# Altium PCB IPMC_MACP - 完成1.PcbDoc (part 2 of 2)
Units mil, origin at the board's own origin, x right, y up, seen from the top; angles counter-clockwise.
Board outline 3909.92 x 3909.91 mil, 2 copper layers (Top Layer, Bottom Layer); 134 components, 84 nets, 498 pads, 203 vias.
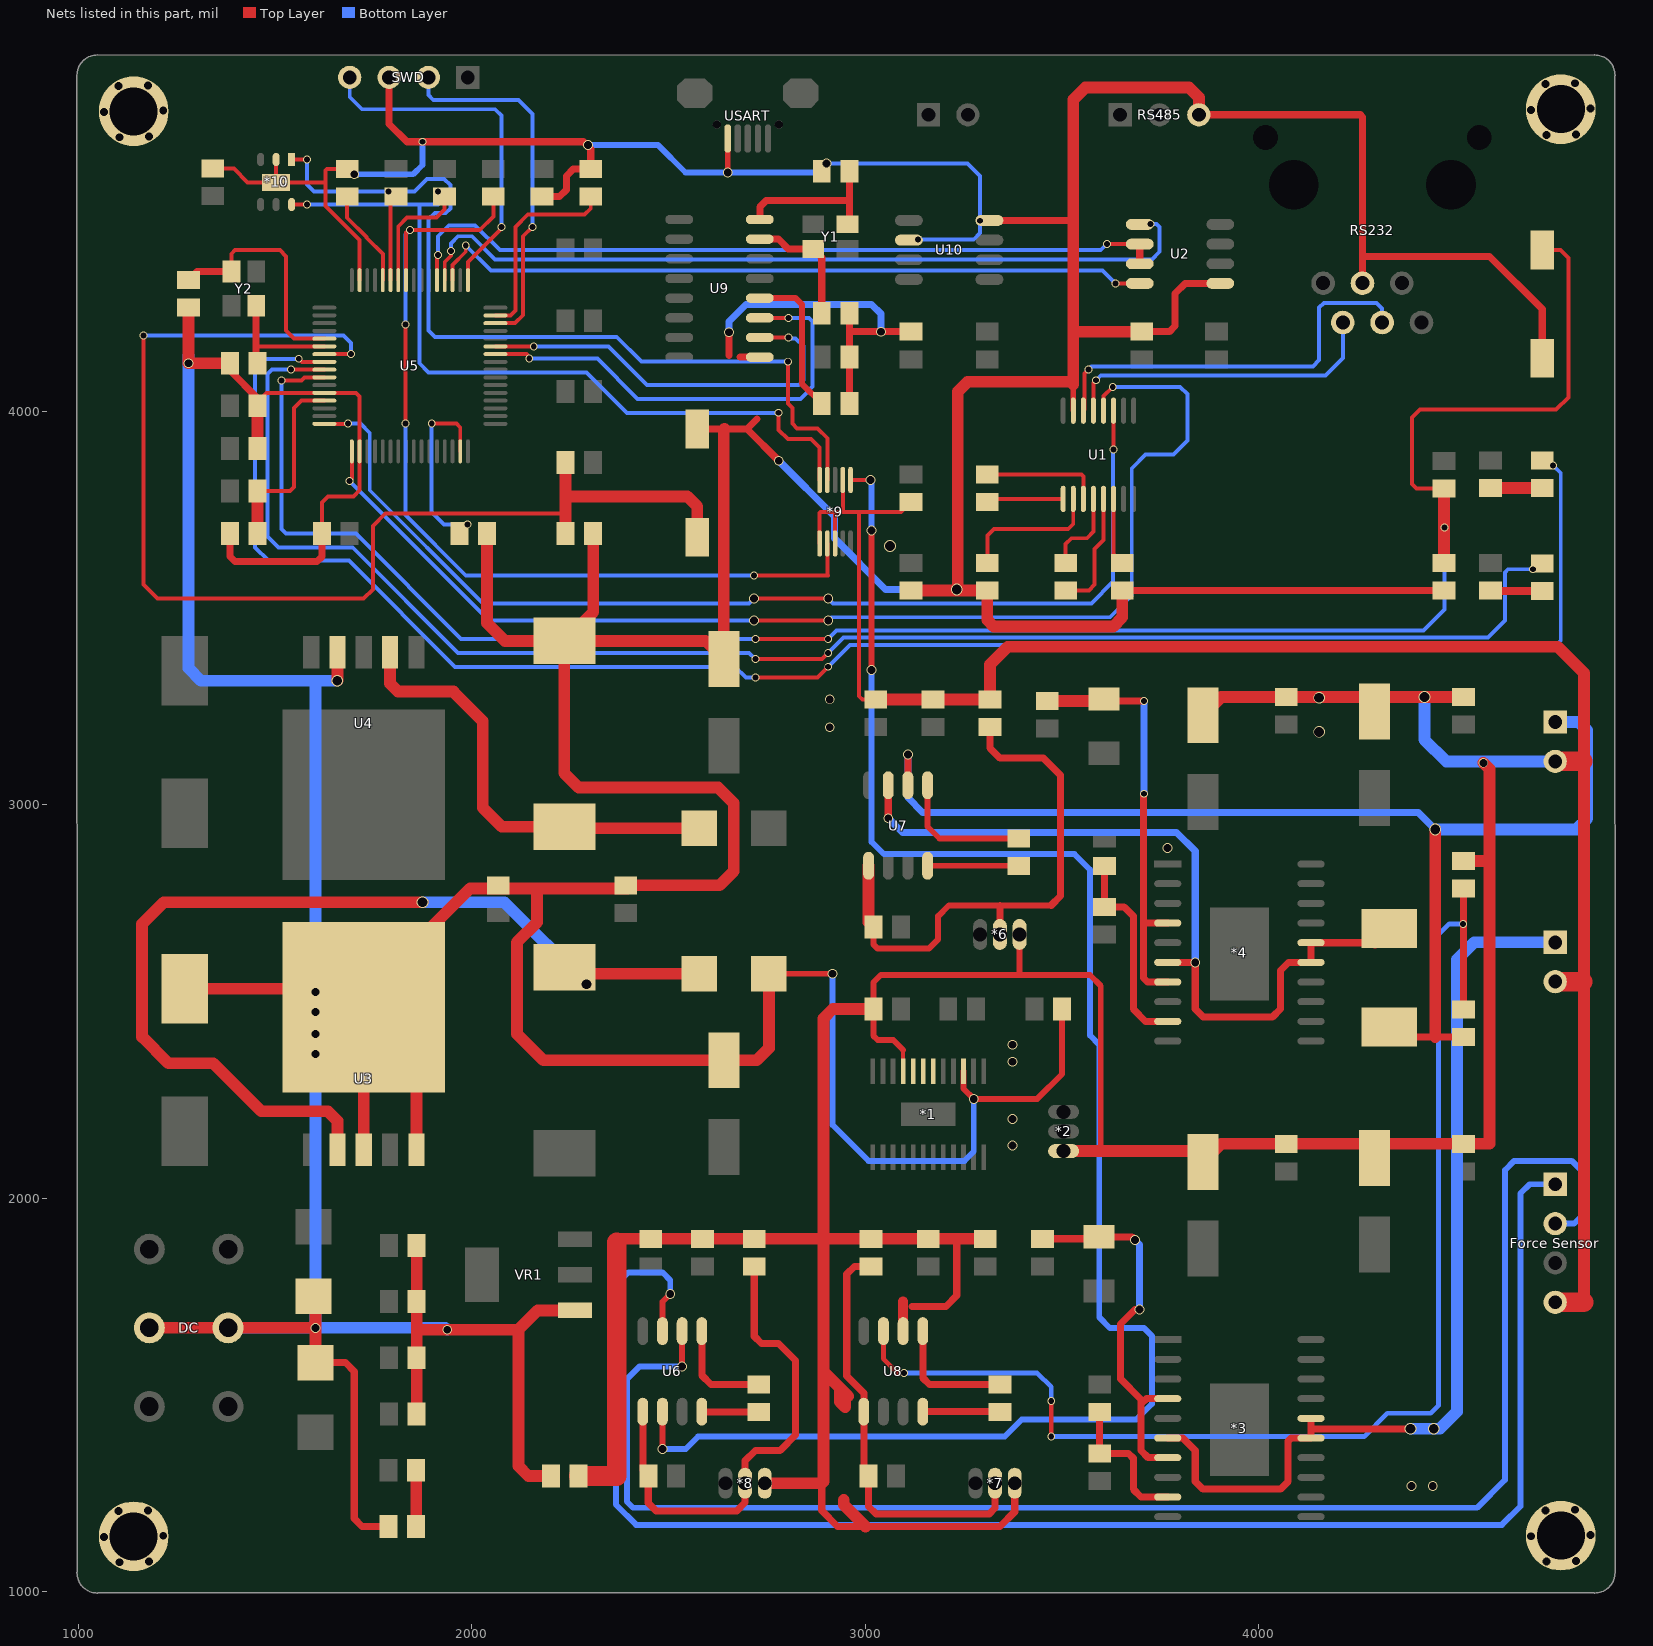
[diagram p2: the nets of this part, all layers, seen from the top]

## Via types
v1: diameter 20, hole 15, Top Layer to Bottom Layer, 76 vias
v2: diameter 25, hole 20, Top Layer to Bottom Layer, 71 vias
v3: diameter 30, hole 25, Top Layer to Bottom Layer, 32 vias
v4: diameter 20, hole 20, Top Layer to Bottom Layer, 24 vias

## Nets (pads, with @x,y where several pads share a name; then routed paths per layer and width w, separated by ;. In a path a pad name is that pad's centre, name@x,y a point inside that pad or via, vN(x,y) a via of type N, cw(c..) or ccw(c..) an arc to the next point about the centre after c; other vN are vias at no path point) (continued)
Force0: *9.6 U6.6 | length 4413
  Top Layer w10: *9.6@2962.39,3825.28 v2(3013.31,3825.28)
  Top Layer w15: v2(2484.29,1362.24) U6.6@2484.29,1456.95 ; v2(3015.75,3342.52) v2(3015.75,3696.85)
  Bottom Layer w15: v2(2484.29,1362.24) 2543.35,1362.24 2574.8,1393.7 3354.33,1393.7 3397.64,1437.01 3688.98,1437.01 3728.35,1476.38 3728.35,1649.61 3708.66,1669.29 3622.05,1669.29 3594.49,1696.85 3594.49,2389.76 3570.87,2413.39 3570.87,2834.65 3531.5,2874.02 3047.24,2874.02 3015.75,2905.51 v2(3015.75,3342.52) ; v2(3015.75,3696.85) v2@3015.75,3822.83
Force+: "Force Sensor.1" U6.3 | length 4089
  Top Layer w15: U6.3@2484.29,1661.68 2484.29,1736.26 v2(2503.94,1755.91)
  Bottom Layer w15: v2(2503.94,1755.91) 2503.94,1791.34 2484.25,1811.02 2397.64,1811.02 2366.14,1779.53 2366.14,1220.47 2417.32,1169.29 4618.11,1169.29 4665.35,1216.54 4665.35,2011.81 4688.54,2035 4753.64,2035
Force-: "Force Sensor.2" U6.2 | length 4016.8
  Top Layer w15: v2(2534.29,1572.01) U6.2@2534.29,1661.68
  Bottom Layer w15: v2(2534.29,1572.01) 2426.34,1572.01 2393.7,1539.37 2393.7,1228.35 2409.45,1212.6 4555.12,1212.6 4625.98,1283.46 4625.98,2070.87 4649.61,2094.49 4795.28,2094.49 4822.83,2066.93 4822.83,1956.69 4801.14,1935 4753.64,1935
GND: *1.15 *10.2 C1.1 C3.2 C5.2 C7.1 C8.2 C9.2 C18.2 C19.1 C20.2 C22.1 C23.2 C26.1 C27.1 C28.1 C29.1 C39.2 C40.2 C41.2 C42.1 C43.2 C45.1 C46.1 C47.1 C48.1 C49.1 C50.2 C51.2 C52.2 C53.2 C54.2 C55.2 D1.1 D7.1 D8.2 D9.K DC.2 KEY.2 L2.2 L3.1 R27.1 RESET.2 RS232.4 RS485.3 SWD.3 T1.1 T2.1 T3.1 U1.15 U2.5 U3.3 U3.5 U3.6 U4.4 U5.12 U5.18 U5.63 U9.1 U10.2 U10.8 USART.5 VR1.1 | length 26229.1
  Top Layer w10: C55.2@1341.18,4616.93 1394.88,4616.93 1429.92,4581.89 *10.2@1501.5,4581.89 ; C52.2@1455.04,4023.62 1478.15,4046.73 U5.12@1624.68,4046.73 1705.24,4046.73 1714.25,4037.72 U5.18@1714.25,3898.11 1714.25,3799.21 1698.5,3783.46 1633.86,3783.46 1618.5,3768.11 C54.2@1618.5,3689.37 ; *10.2@1502.13,4639.89 1502.13,4582.52 *10.2@1501.5,4581.89 ; R27.1@1682.76,4615.67 1631.42,4615.67 1627.48,4611.73 1627.48,4578.74 ; U5.63@1714.25,4333.15 1714.25,4434.97 1627.48,4521.74 1627.48,4578.74 ; *10.2@1501.5,4581.89 1624.33,4581.89 1627.48,4578.74
  Top Layer w15: v2(2650.08,4606.77) USART.5@2650.08,4693.64 ; D1.1@2754.69,2570 v2(2916.46,2570) ; *1.15@3249.48,2322.45 3249.48,2278.08 v2(3275.59,2251.97) 3437.01,2251.97 3500.2,2315.16 C1.1@3500.2,2480.51 ; U1.15@3528.54,4001.57 3528.54,4067.91
  Top Layer w18: C53.2@1384.96,3689.37 1384.96,3630.79 1397.64,3618.11 1606.3,3618.11 1618.5,3630.32 C54.2@1618.5,3689.37 ; C48.1@1384.96,4121.89 1384.96,4103.23 1455.04,4033.15 1455.04,4023.62 C52.2@1455.04,4013.76 ; D8.2@1602.2,1581.69 1678.15,1581.69 1700.79,1559.06 1700.79,1185.04 1720.83,1165 D9.K@1788.11,1165 ; SWD.3@1789.25,4848.64 1789.25,4730.43 1834.65,4685.04 v1(1874.02,4685.04) 2283.46,4685.04 2301.97,4666.54 C41.2@2301.97,4615.67 2257.4,4615.67 2240.16,4598.43 2240.16,4562.99 2222.76,4545.59 C51.2@2178.13,4545.59 ; RESET.2@2572.52,3954.96 2641.73,3954.96 2699.06,3954.96 ; 2653.54,4141.73 v2(2653.54,4200.79) ; 2681.46,4137.44 U9.1@2731.68,4137.44 ; 2724.41,3980.31 2699.06,3954.96 ; v2(2780,3874.02) 2699.06,3954.96 ; C43.2@2959.24,4019.68 C42.1@2959.24,4138.23 2959.24,4204.72 ; C45.1@2959.24,4249.28 2959.24,4204.72 ; C49.1@3115.82,4202.2 v2(3039.37,4202.2) 2961.76,4202.2 2959.24,4204.72 ; U10.8@3315.29,4485 3527.8,4485 3528.54,4484.25 ; C8.2@3653.23,3544.33 C20.2@4456.16,3544.33 ; C7.1@3702.79,4202.2 3773.07,4202.2 3787.4,4216.54 3787.4,4299.21 3813.19,4325 U2.5@3902.26,4325 ; RS485.3@3847.75,4753.64 4258.17,4753.64 4263.67,4748.14 4263.67,4393.7 ; RS232.4@4263.67,4325.57 4263.67,4393.7 ; KEY.2@4720.71,4134.41 4720.71,4259.61 4586.61,4393.7 4263.67,4393.7
  Top Layer w30: DC.2@1180,1670 DC.2@1380,1670 1591.26,1670 v2@1594.49,1673.23 ; C9.2@1270,2531.77 1678.23,2531.77 U3.6@1725,2485 ; C47.1@1279.37,4263.8 1279.37,4122.2 v2(1279.69,4121.89) C48.1@1384.96,4121.89 ; C50.2@1455.04,3905.63 C52.2@1455.04,4013.76 ; D8.2@1602.52,1593.7 v2(1602.52,1669.29) D7.1@1602.52,1756.89 ; v3(1657.48,3314.96) 1658.07,3315.55 U4.4@1658.07,3387.68 ; U3.3@1725,2122.32 U3.6@1725,2485 ; U3.5@1858.86,2122.32 1858.86,2351.14 U3.6@1725,2485 ; C27.1@1859.39,1450.84 C26.1@1859.39,1593.75 1859.39,1665.21 ; C29.1@1859.39,1879.59 C28.1@1859.39,1736.67 1859.39,1665.21 ; C40.2@2038.58,3689.37 2038.58,3461.42 2083.78,3416.22 L2.2@2234.69,3416.22 ; L3.1@2201.18,1293.31 2143.7,1293.31 2117.97,1319.04 2117.97,1665.21 ; VR1.1@2261.89,1714.45 2167.2,1714.45 2117.97,1665.21 ; C39.2@2308.07,3689.37 2308.07,3489.61 L2.2@2234.69,3416.22 ; C23.2@2390.79,2794.88 2629.53,2794.88 2665.35,2830.71 2665.35,3003.94 2625.98,3043.31 2271.65,3043.31 2234.69,3080.28 L2.2@2234.69,3416.22 ; C23.2@2394.72,2787.01 2165.35,2787.01 ; 2641.73,3954.96 2640.12,3953.35 C22.1@2640.12,3370 2593.9,3416.22 L2.2@2234.69,3416.22 ; D1.1@2754.69,2570 2754.69,2380.67 2724.02,2350 C18.2@2640.12,2350 2181.5,2350 2114.17,2417.32 2114.17,2649.61 2165.35,2700.79 2165.35,2787.01 ; C3.2@3115.82,3544.33 3212.6,3544.33 ; 3528.54,4067.91 3528.54,4074.8 ; C8.2@3653.23,3544.33 3653.23,3476.38 3629.61,3452.76 3326.77,3452.76 3310.04,3469.49 C5.2@3310.04,3544.33 3212.6,3544.33 ; C7.1@3702.79,4202.2 3528.54,4202.2 ; RS485.3@3847.75,4753.64 3847.75,4797.91 3822.83,4822.83 3559.05,4822.83 3528.54,4792.32 3528.54,4484.25 3528.54,4202.2 ; U3.6@1725,2485 1725,2516.34 1995.67,2787.01 2070.71,2787.01 2165.35,2787.01 ; 1859.39,1665.21 v2(1937.01,1665.21) 2117.97,1665.21 ; 3212.6,3544.33 3229.37,3544.33 3235.03,3549.99 3235.03,4049.99 3259.84,4074.8 3528.54,4074.8 ; 3528.54,4074.8 3528.54,4202.2
  Bottom Layer w10: v2(2901.57,4629.92) 3259.84,4629.92 3291.34,4598.43 v1(3291.34,4484.25) 3291.34,4452.76 3275.59,4437.01 v1(3133.86,4437.01)
  Bottom Layer w15: v2(1700.79,4602.36) 1850.39,4602.36 1874.02,4625.98 v1(1874.02,4685.04) ; v2(2295.28,4677.17) 2472.44,4677.17 2542.83,4606.77 v2(2650.08,4606.77) 2878.43,4606.77 v2(2901.57,4629.92) ; v2(2916.46,2570) 2916.46,2185.91 3007.87,2094.49 3251.97,2094.49 3275.59,2118.11 v2(3275.59,2251.97)
  Bottom Layer w18: v2(2653.54,4200.79) 2653.54,4228.35 2696.85,4271.65 3015.75,4271.65 3039.37,4248.03 v2(3039.37,4202.2) ; v2(2780,3874.02) 2921.26,3732.76 2921.26,3677.17 3051.18,3547.24 3212.6,3547.24
  Bottom Layer w30: 1279.53,4141.73 1279.53,3346.46 1311.02,3314.96 1598.43,3314.96 ; DC.2@1380,1670 v2@1602.52,1670 ; v2(1602.52,1669.29) v2@1602.52,1670 ; v3(1657.48,3314.96) 1598.43,3314.96 ; v2(1937.01,1665.21) 1932.22,1670 v2@1602.52,1670 ; 1598.43,3314.96 1602.52,3310.87 v2(1602.52,2523.46) v2(1602.52,2366.14) v2@1602.52,1670
  other v2: 1602.36,2417.32 1602.36,2472.44
  other v3: 3232.28,3547.24 3062.99,3657.48
  other v4: 1103.77,1074.09 1178.96,1075.66 1064.8,1138.43 1215.2,1141.57 1101.04,1204.34 1176.23,1205.91 1103.77,4696.61 1178.96,4698.18 4731.48,4701.81 4806.68,4703.38 1064.8,4760.94 1215.2,4764.09 4692.52,4766.14 4842.91,4769.29 1101.04,4826.85 1176.23,4828.43 4728.75,4832.05 4803.95,4833.63
KEY1: C20.1 KEY.1 R5.2 U5.10 | length 5093.5
  Top Layer w10: v1(1516.26,4078.23) 1566.42,4078.23 1574.29,4086.1 U5.10@1624.68,4086.1 ; v1(2720.47,3421.26) v1(2905.51,3421.26) ; R5.2@4470.71,3803.78 4400.94,3803.78 4389.76,3814.96 4389.76,3984.25 4409.45,4003.94 4755.91,4003.94 4787.4,4035.43 4787.4,4389.76 4767.17,4410 KEY.1@4720.71,4410
  Top Layer w30: C20.1@4470.71,3614.41 R5.2@4470.71,3803.78
  Bottom Layer w10: v1(1516.26,4078.23) 1516.26,3700.28 1527.56,3688.98 1704.72,3688.98 1972.44,3421.26 v1(2720.47,3421.26) ; v1(2905.51,3421.26) 2926.45,3442.2 4418.57,3442.2 4472.44,3496.06 v1(4472.44,3704.72)
LED_G: LED1.K U5.9 | length 4073.9
  Top Layer w10: v1(1539.88,4105.79) U5.9@1624.68,4105.79 ; v1(2720.47,3370.08) 2889.76,3370.08 v1(2905.51,3385.83)
  Bottom Layer w10: v1(1539.88,4105.79) 1491.61,4105.79 1480.32,4094.49 1480.32,3681.1 1507.87,3653.54 1696.85,3653.54 1964.57,3385.83 2704.72,3385.83 v1(2720.47,3370.08) ; v1(2905.51,3385.83) 2944.88,3425.2 4582.68,3425.2 4625.98,3468.5 4625.98,3590.55 4633.86,3598.43 v1(4696.85,3598.43)
LED_R: LED0.K U5.8 | length 4593.4
  Top Layer w10: v1(1559.57,4133.35) 1567.44,4125.47 U5.8@1624.68,4125.47 ; v1(2720.47,3322.83) 2877.95,3322.83 v1(2905.51,3350.39)
  Bottom Layer w10: v1(1559.57,4133.35) 1471.93,4133.35 1448.82,4110.24 1448.82,3653.54 1482.28,3620.08 1687.01,3620.08 1956.69,3350.39 2669.29,3350.39 2696.85,3322.83 v1(2720.47,3322.83) ; v1(2905.51,3350.39) 2960.63,3405.51 4755.91,3405.51 4767.72,3417.32 4767.72,3842.52 v1(4748.03,3862.2)
Net*3_4: *3.4 *3.7 D5.2 R6.1 | length 983.5
  Top Layer w18: R6.1@3450.34,1896.38 3589.31,1896.38 D5.2@3594.37,1901.44 3677.3,1901.44 v2(3685.04,1893.7) ; v2(3696.85,1716.54) 3685.04,1716.54 3648.31,1679.81 3648.31,1540.67 3700.79,1488.19 3700.79,1476.38 ; *3.7@3768.63,1339.91 3719.15,1339.91 3700.79,1358.27 3700.79,1476.38 ; *3.4@3768.63,1489.91 3714.31,1489.91 3700.79,1476.38
  Bottom Layer w18: v2@3681.1,1897.64 3696.85,1881.89 v2(3696.85,1716.54)
Net*3_9: *3.9 C24.2 R10.2 | length 370.4
  Top Layer w18: R10.2@3595.69,1456.1 C24.2@3595.69,1350.61 3669.07,1350.61 3681.1,1338.58 3681.1,1259.84 3701.04,1239.91 *3.9@3768.63,1239.91
Net*4_4: *4.4 *4.7 D6.2 R8.1 | length 1079
  Top Layer w18: D6.2@3601.44,3263.24 3601.98,3263.78 v1(3708.66,3263.78) ; v1(3708.66,3027.56) 3707.1,3026 3707.1,2699 ; *4.7@3768.63,2549 3717.16,2549 3707.1,2559.06 3707.1,2699 ; *4.4@3768.63,2699 3707.1,2699
  Top Layer w30: R8.1@3462.47,3263.24 D6.2@3601.44,3263.24
  Bottom Layer w18: v1(3708.66,3027.56) v1(3708.66,3263.78)
Net*4_6: *4.6 *4.15 *4.16 R7.1 U7.3 | length 2051.3
  Top Layer w18: v2(3058.14,2965.48) U7.3@3058.14,3049.32 ; *4.6@3768.63,2599 v2@3838.58,2599 ; v2(3838.58,2598.43) 3838.58,2480.31 3858.27,2460.63 4035.43,2460.63 4055.12,2480.32 4055.12,2578.74 4075.38,2599 *4.15@4132.96,2599 *4.16@4132.96,2649 R7.1@4295.44,2649
  Top Layer w30: R7.1@4295.44,2649 R7.1@4331.43,2684.98
  Bottom Layer w18: v2(3058.14,2965.48) 3094.49,2929.13 3791.34,2929.13 3838.58,2881.89 v2(3838.58,2598.43)
Net*4_9: *4.9 C25.2 R11.2 | length 523.6
  Top Layer w18: R11.2@3607.81,2843.74 C25.2@3607.81,2739.71 3657.93,2739.71 3681.1,2716.54 3681.1,2480.32 3712.42,2449 *4.9@3768.63,2449
Net*6_2: *6.2 C30.2 R18.1 U7.5 | length 1417.3
  Top Layer w15: R18.1@3020.35,2689 3020.35,2645.01 3031.5,2633.86 3161.42,2633.86 3185.04,2657.48 3185.04,2716.54 3212.6,2744.09 3342.52,2744.09 3472.44,2744.09
  Top Layer w18: C30.2@3317.13,3196.91 3317.13,3143.5 3342.52,3118.11 3452.76,3118.11 3496.06,3074.8 3496.06,2767.72 3472.44,2744.09 ; *6.2@3341.89,2670 3341.89,2743.46 3342.52,2744.09
  Top Layer w30: U7.5@3008.14,2844.59 3008.14,2701.21 R18.1@3020.35,2689
Net*7_2: *7.2 C31.2 R19.1 U8.5 | length 1082.4
  Top Layer w18: C31.2@3014.32,1826.3 2971.97,1826.3 2952.76,1807.09 2952.76,1547.24 2996.02,1503.98 U8.5@2996.02,1456.95 2996.02,1305.51 R19.1@3008.22,1293.31 3008.22,1216.19 3027.56,1196.85 3314.96,1196.85 3329.76,1211.65 *7.2@3329.76,1275
Net*8_2: *8.2 C32.2 R20.1 U6.5 | length 1260.6
  Top Layer w18: U6.5@2434.29,1456.95 2434.29,1307.2 R20.1@2448.19,1293.31 2448.19,1225.04 2468.5,1204.72 2673.23,1204.72 2694.29,1225.79 *8.2@2694.29,1275 2694.29,1332.09 2720.47,1358.27 2783.46,1358.27 2822.83,1397.64 2822.83,1586.61 2779.53,1629.92 2736.22,1629.92 2717.54,1648.6 C32.2@2717.54,1826.3
NetC2_1: C2.1 U1.3 | length 303.6
  Top Layer w10: C2.1@3310.04,3839.61 3549.17,3839.61 3554.13,3834.65 U1.3@3554.13,3777.17
NetC2_2: C2.2 U1.1 | length 196.1
  Top Layer w10: C2.2@3310.04,3769.53 3317.68,3777.17 U1.1@3502.95,3777.17
NetC4_1: C4.1 U1.4 | length 215
  Top Layer w10: C4.1@3509.25,3614.41 3509.25,3662.8 3523.62,3677.17 3562.99,3677.17 3579.72,3693.9 U1.4@3579.72,3777.17
NetC4_2: C4.2 U1.5 | length 307
  Top Layer w10: C4.2@3509.25,3544.33 3567.95,3544.33 3582.68,3559.06 3582.68,3649.61 3605.31,3672.24 U1.5@3605.31,3777.17
NetC5_1: C5.1 U1.2 | length 364
  Top Layer w10: C5.1@3310.04,3614.41 3310.04,3684.06 3326.77,3700.79 3515.75,3700.79 3528.54,3713.58 U1.2@3528.54,3777.17
NetC8_1: C8.1 U1.6 | length 172
  Top Layer w10: U1.6@3630.91,3777.17 3630.91,3636.73 C8.1@3653.23,3614.41
NetC40_1: C40.1 U5.31 | length 465.3
  Top Layer w10: v1(1897.64,3968.5) 1960.63,3968.5 1970.16,3958.98 U5.31@1970.16,3898.11
  Bottom Layer w10: v1(1897.64,3968.5) 1897.64,3744.09 1929.13,3712.6 v1(1988.19,3712.6)
NetC41_1: C41.1 U5.47 | length 509.4
  Top Layer w10: U5.47@2059.72,4243.58 2097.91,4243.58 2110.24,4255.91 2110.24,4468.5 2141.73,4500 2286.22,4500 2301.97,4515.75 C41.1@2301.97,4545.59
NetC43_1: C43.1 U9.4 | length 386.4
  Top Layer w15: U9.4@2731.68,4287.44 2822.8,4287.44 2838.58,4271.65 2838.58,4070.26 C43.1@2889.16,4019.68
NetC45_2: C45.2 U9.7 Y1.1 | length 318.6
  Top Layer w18: U9.7@2731.68,4437.44 2779.09,4437.44 2803.96,4412.57 Y1.1@2867.84,4412.57 2889.16,4391.25 C45.2@2889.16,4249.28
NetC46_2: C46.2 U9.8 Y1.3 | length 402.6
  Top Layer w18: U9.8@2731.68,4487.44 2731.68,4519.08 2748.03,4535.43 2959.24,4535.43 ; Y1.3@2954.45,4475.57 2959.24,4480.35 2959.24,4535.43 ; C46.2@2959.24,4610.24 2959.24,4535.43
NetC53_1: C53.1 L4.1 U5.13 | length 490.5
  Top Layer w10: L4.1@1455.04,3797.5 1537.66,3797.5 1547.24,3807.09 1547.24,4007.87 1566.42,4027.05 U5.13@1624.68,4027.05
  Top Layer w30: C53.1@1455.04,3689.37 L4.1@1455.04,3797.5
NetD1_2: D1.2 L1.1 U3.2 | length 2535
  Top Layer w30: U3.2@1658.07,2122.32 1658.07,2196.26 1633.86,2220.47 1464.57,2220.47 1342.52,2342.52 1228.35,2342.52 1161.42,2409.45 1161.42,2696.85 1216.54,2751.97 v3(1874.02,2751.97) ; L1.1@2234.69,2586.22 2250.91,2570 D1.2@2577.52,2570
  Bottom Layer w30: v3(1874.02,2751.97) 2082.68,2751.97 v3(2291.34,2543.31)
NetD2_A: LED1.A R3.2 | length 132.4
  Top Layer w20: R3.2@4588.82,3544.33 4590.06,3543.09 LED1.A@4720.71,3543.09
NetD3_A: LED0.A R4.2 | length 131.9
  Top Layer w30: R4.2@4588.82,3804.96 LED0.A@4720.71,3804.96
NetD4_2: D4.2 L2.1 U4.2 | length 1147
  Top Layer w30: U4.2@1791.93,3387.68 1791.93,3307.68 1812.2,3287.4 1952.76,3287.4 2027.56,3212.6 2027.56,2992.13 2075.91,2943.78 L2.1@2234.69,2943.78 2238.46,2940 D4.2@2577.52,2940
NetD9_A: D9.A R24.2 | length 142.9
  Top Layer w30: D9.A@1858.19,1165 R24.2@1858.19,1307.92
NetR9_2: R9.2 R12.1 U8.3 | length 3247
  Top Layer w12: U8.3@3046.02,1661.68 3046.02,1591.78 3082.68,1555.12 v1(3098.43,1555.12) ; v1(3472.44,1393.7) v1(3472.44,1484.25)
  Top Layer w18: R9.2@4520.18,2479.71 R12.1@4520.18,2786.39
  Bottom Layer w12: v1(3098.43,1555.12) 3437.01,1555.12 3472.44,1519.68 v1(3472.44,1484.25) ; v1(3472.44,1393.7) 4267.72,1393.7 4326.77,1452.76 4437.01,1452.76 4456.69,1472.44 4456.69,2669.29 4484.25,2696.85 v1(4519.69,2696.85)
NetR13_1: R13.1 U8.1 | length 322
  Top Layer w18: U8.1@3146.02,1661.68 3146.02,1542.96 3162.8,1526.18 R13.1@3342.31,1526.18
NetR13_2: R13.2 U8.8 | length 196.6
  Top Layer w18: U8.8@3146.02,1456.95 3341.46,1456.95 R13.2@3342.31,1456.1
NetR14_1: R14.1 U7.1 | length 349.4
  Top Layer w15: U7.1@3158.14,3049.32 3158.14,2944.22 3188.54,2913.82 R14.1@3389.87,2913.82
NetR14_2: R14.2 U7.8 | length 232.1
  Top Layer w15: U7.8@3158.14,2844.59 3389.02,2844.59 R14.2@3389.87,2843.74
NetR15_1: R15.1 U6.1 | length 266.8
  Top Layer w18: U6.1@2584.29,1661.68 2584.29,1549.57 2607.68,1526.18 R15.1@2729.29,1526.18
NetR15_2: R15.2 U6.8 | length 145.4
  Top Layer w18: U6.8@2584.29,1456.95 2585.14,1456.1 R15.2@2729.29,1456.1
NetR27_2: R27.2 U5.60 | length 249.9
  Top Layer w10: R27.2@1682.76,4545.59 1682.76,4491.92 1732.25,4442.43 1732.25,4440.98 1773.31,4399.92 U5.60@1773.31,4333.15
NRST: C39.1 R26.2 RESET.1 U5.7 | length 3140.5
  Top Layer w10: v1(1165.35,4192.91) 1165.35,3559.06 1200.79,3523.62 1724.41,3523.62 1748.03,3547.24 1748.03,3708.66 1779.53,3740.16 2237.99,3740.16 ; U5.7@1624.68,4145.16 v1(1692.4,4145.16)
  Top Layer w30: C39.1@2237.99,3689.37 2237.99,3740.16 2237.99,3783.46 ; R26.2@2237.99,3869.68 2237.99,3783.46 ; RESET.1@2572.52,3679.37 2572.52,3758.19 2547.24,3783.46 2237.99,3783.46
  Bottom Layer w10: v1(1165.35,4192.91) 1673.23,4192.91 1692.91,4173.23 v1@1692.91,4145.67
OSC_IN: C47.2 U5.5 Y2.3 | length 606.9
  Top Layer w10: Y2.3@1388.5,4355.2 1388.5,4400.31 1397.64,4409.45 1511.81,4409.45 1527.56,4393.7 1527.56,4204.72 1547.76,4184.53 U5.5@1624.68,4184.53
  Top Layer w18: C47.2@1279.37,4333.87 1300.69,4355.2 Y2.3@1388.5,4355.2
OSC_OUT: C48.2 U5.6 Y2.1 | length 321.6
  Top Layer w10: 1451.5,4165.35 1452.01,4164.84 U5.6@1624.68,4164.84
  Top Layer w18: Y2.1@1451.5,4268.58 1451.5,4165.35 1451.5,4125.43 C48.2@1455.04,4121.89
PC12: U2.2 U2.3 U5.53 | length 1984.9
  Top Layer w10: U5.53@1911.1,4333.15 1911.1,4390.87 1911.65,4391.42 v1@1912.79,4391.42 ; v1(3614.37,4425) U2.2@3697.53,4425
  Top Layer w18: U2.3@3697.53,4375 U2.2@3697.53,4425
  Bottom Layer w10: v1(1913.39,4397.64) 1913.39,4444.88 1940.94,4472.44 2007.87,4472.44 2070.87,4409.45 3598.43,4409.45 v1@3614.17,4425.2
RDY0: *9.2 R16.1 U5.57 | length 2347.5
  Top Layer w10: v1(1830.71,3968.5) v1(1830.71,4220.47) ; U5.57@1832.36,4333.15 1832.36,4454.41 ; v1(1842.52,4460.63) 2019.68,4460.63 2054.28,4495.23 R16.1@2054.28,4545.59 ; v1(2716.54,3582.68) 2905.51,3582.68 2903.33,3584.86 *9.2@2903.33,3663.86
  Bottom Layer w10: v1(1830.71,3968.5) 1830.71,3736.22 1984.25,3582.68 v1(2716.54,3582.68) ; v1(1830.71,4220.47) 1830.71,4448.82 v1(1842.52,4460.63)
RXD: U5.43 U9.2 | length 1035.4
  Top Layer w10: U5.43@2059.72,4164.84 v1(2156.97,4164.84) ; U9.2@2731.68,4187.44 v1(2804.69,4187.44)
  Bottom Layer w10: v1(2156.97,4164.84) 2346.97,4164.84 2444.88,4066.93 2830.71,4066.93 2842.52,4078.74 2842.52,4165.35 2822.83,4185.04 v1@2803.15,4185.04
RXD2: U1.12 U5.17 | length 3118.6
  Top Layer w10: v1(1688.98,3822.83) 1694.57,3828.43 U5.17@1694.57,3898.11 ; v2(2716.54,3468.5) v2(2905.51,3468.5) ; U1.12@3605.31,4001.57 3605.31,4038.39 v1(3628.94,4062.01)
  Bottom Layer w10: v1(1688.98,3822.83) 2043.31,3468.5 v2(2716.54,3468.5) ; v2(2905.51,3468.5) 2913.39,3476.38 3622.05,3476.38 3677.17,3531.5 3677.17,3854.33 3712.6,3889.76 3783.46,3889.76 3818.9,3925.2 3818.9,4043.31 3800.2,4062.01 v1(3628.94,4062.01)
RXD2_In: RS232.5 U1.13 | length 821
  Top Layer w10: U1.13@3579.72,4001.57 3579.72,4071.85 v1(3586.61,4078.74)
  Bottom Layer w10: v1(3586.61,4078.74) 3598.43,4090.55 4169.29,4090.55 4213.67,4134.93 RS232.5@4213.67,4225.57
RXD3: U2.1 U5.52 | length 2023.8
  Top Layer w10: U5.52@1930.79,4333.15 1930.79,4379.61 1946.54,4395.35 v1(1946.54,4407.17)
  Bottom Layer w10: v1(1946.54,4407.17) 1946.54,4426.85 1964.57,4444.88 2000,4444.88 2059.06,4385.83 3728.35,4385.83 3748.03,4405.51 3748.03,4468.5 3740.16,4476.38 v1@3732.28,4476.38
  other v1: 3724.41,4476.38
SCL: *9.10 *10.6 R17.1 U5.58 | length 2324.3
  Top Layer w10: *10.6@1541.5,4525.72 v1@1576.9,4525.72 ; U5.58@1812.68,4333.15 1812.68,4470.16 1834.65,4492.13 1909.45,4492.13 1930.44,4513.12 R17.1@1930.44,4545.59 ; v1(2779.53,3996.06) 2779.53,3952.76 2803.15,3929.13 2862.2,3929.13 2883.65,3907.69 *9.10@2883.65,3825.28
  Bottom Layer w10: v1(1580.58,4525.72) 1866.14,4525.72 ; v1(1913.39,4559.06) 1913.39,4525.72 1866.14,4525.72 ; v1(2779.53,3996.06) 2393.7,3996.06 2291.34,4098.43 1889.76,4098.43 1866.14,4122.05 1866.14,4525.72
SDA: *9.9 *10.1 R21.1 U5.59 | length 2438.7
  Top Layer w10: *10.1@1541.5,4639.89 v1(1580.58,4639.89) ; U5.59@1792.99,4333.15 1792.99,4531.98 R21.1@1806.6,4545.59 ; v1(2803.15,4125.98) 2803.15,4019.69 2814.96,4007.87 2814.96,3968.5 2826.77,3956.69 2877.95,3956.69 2903.33,3931.31 *9.9@2903.33,3825.28
  Bottom Layer w10: v1(1580.58,4639.89) 1580.58,4576.9 1598.43,4559.06 v1(1787.4,4559.06) 1854.33,4559.06 1885.83,4590.55 1929.13,4590.55 1944.88,4574.8 1944.88,4515.75 1933.07,4503.94 1905.51,4503.94 1889.76,4488.19 1889.76,4204.72 1905.51,4188.98 2368.11,4188.98 2431.1,4125.98 v1(2803.15,4125.98)
SGND: "Force Sensor.4" *1.18 *1.19 *1.20 *1.21 *2.1 *6.1 *7.1 *8.1 *9.1 *9.3 *9.7 C6.1 C10.2 C11.1 C12.1 C13.1 C14.2 C15.1 C16.1 C17.1 C30.1 C31.1 C32.1 C33.1 C34.1 C35.1 C36.1 C37.1 C38.1 C44.2 DA0.2 DA1.2 L3.2 R12.2 T4.1 U8.2 | length 13799.8
  Top Layer w10: *9.1@2883.65,3663.86 2883.65,3741.91 2885.83,3744.09 2925.2,3744.09 ; *9.3@2923.02,3663.86 2923.02,3741.91 2925.2,3744.09 ; *9.7@2942.7,3825.28 2942.7,3744.09 ; C34.1@3026.45,3266.99 2992.85,3266.99 2984.25,3275.59 2984.25,3744.09 ; *1.21@3095.94,2322.45 3095.94,2376.5 ; C44.2@3115.82,3769.53 3090.39,3744.09 2984.25,3744.09 ; 2925.2,3744.09 2942.7,3744.09 ; 2942.7,3744.09 2984.25,3744.09
  Top Layer w15: 3095.94,2376.5 3070.87,2401.57 3031.5,2401.57 3020.35,2412.72 C6.1@3020.35,2480.51 3020.35,2547.91 3039.37,2566.93 3393.7,2566.93 ; *6.1@3391.89,2670 3391.89,2568.74 3393.7,2566.93 ; 3598.43,2119.2 3598.43,2539.37 3570.87,2566.93 3393.7,2566.93
  Top Layer w18: 2889.17,1275 2889.17,1205.32 2929.13,1165.35 3000,1165.35 3342.52,1165.35 3379.76,1202.6 *7.1@3379.76,1275 ; 3118.11,1724.41 3204.72,1724.41 3232.28,1751.97 3232.28,1896.38
  Top Layer w25: U8.2@3096.02,1661.68 3096.02,1737.75
  Top Layer w30: 2368.11,1891.73 2368.11,1887.8 2376.7,1896.38 C33.1@2454.29,1896.38 C36.1@2585.92,1896.38 C32.1@2717.54,1896.38 2893.7,1896.38 ; *8.1@2744.29,1275 2889.17,1275 2893.7,1279.53 2893.7,1896.38 ; 2901.57,1551.18 2935.04,1517.72 ; 2944.88,1232.28 2944.88,1220.47 3000,1165.35 ; 2948.82,1480.32 2948.82,1468.5 2935.04,1482.28 2935.04,1517.72 ; 2956.69,1496.06 2935.04,1517.72 ; C6.1@3020.35,2480.51 2917.52,2480.51 2893.7,2456.69 2893.7,1896.38 ; C34.1@3026.45,3266.99 C37.1@3171.79,3266.99 C30.1@3317.13,3266.99 3317.13,3356.5 3362.2,3401.57 4759.84,3401.57 4826.77,3334.65 4826.77,3110 4823.07,3110 4826.77,3106.3 4826.77,2547.24 ; C38.1@3305,1896.38 3232.28,1896.38 C35.1@3159.66,1896.38 C31.1@3014.32,1896.38 2893.7,1896.38 ; *2.1@3504.08,2119.2 3598.43,2119.2 3830.51,2119.2 C11.1@3858.13,2091.57 3904.42,2137.86 C13.1@4070.18,2137.86 C12.1@4520.18,2137.86 4586.68,2137.86 4586.68,3090.49 v2(4570.87,3106.3) ; C15.1@3858.13,3226.95 3904.42,3273.24 C17.1@4070.18,3273.24 v3(4421.26,3273.24) C16.1@4520.18,3273.24 ; R12.2@4520.18,2856.47 4584.88,2856.47 ; 4824.02,2550 4826.77,2547.24 ; 4825.55,1735 4826.77,1736.22 4826.77,2547.24
  Top Layer w50: L3.2@2271.26,1293.31 2368.11,1293.31 2368.11,1887.8 ; 4753.64,1735 4825.55,1735 ; DA1.2@4753.64,2550 4824.02,2550 ; DA0.2@4753.64,3110 4823.07,3110
  Bottom Layer w30: v3(4421.26,3273.24) 4421.26,3165.35 4476.61,3110 DA0.2@4753.64,3110
  other v2: 4388.33,1267.72 4442.38,1267.72 3374.02,2133.86 3374.02,2200.79 3374.02,2346.46 3374.02,2389.76 3767.72,2889.76 2909.45,3196.85 2909.45,3267.72
  other v3: 4153.54,3185.04 4153.54,3271.65
  other v4: 4731.48,1075.82 4806.68,1077.4 4692.52,1140.16 4842.91,1143.31 4728.75,1206.07 4803.95,1207.64
SWCLK: SWD.4 U5.49 | length 908.7
  Top Layer w10: U5.49@1989.84,4333.15 1989.84,4379.61 2074.8,4464.57 v1(2074.8,4468.5)
  Bottom Layer w10: SWD.4@1689.25,4848.64 1689.25,4798.94 1720.47,4767.72 2059.06,4767.72 2074.8,4751.97 v1(2074.8,4468.5)
SWDIO: SWD.2 U5.46 | length 929.2
  Top Layer w10: U5.46@2059.72,4223.9 2109.72,4223.9 2129.92,4244.09 2129.92,4444.88 v1(2153.54,4468.5)
  Bottom Layer w10: SWD.2@1889.25,4848.64 1889.25,4803.66 1901.57,4791.34 2118.11,4791.34 2153.54,4755.91 v1(2153.54,4468.5)
TXD: U5.42 U9.3 | length 1169.7
  Top Layer w10: U5.42@2059.72,4145.16 2138.31,4145.16 v1@2145.67,4137.8 ; U9.3@2731.68,4237.44 v1(2804.69,4237.44) v1@2805.87,4237.44
  Bottom Layer w10: v1(2145.67,4133.86) 2318.9,4133.86 2421.26,4031.5 2834.65,4031.5 2866.14,4062.99 2866.14,4228.35 2857.05,4237.44 v1(2804.69,4237.44)
TXD2: U1.11 U5.16 | length 2750.2
  Top Layer w10: U5.16@1624.68,3967.99 1684.53,3967.99 v1(1685.04,3968.5) ; v2(2716.54,3523.62) v2(2905.51,3523.62) ; v1(3630.91,3902.56) U1.11@3630.91,4001.57
  Bottom Layer w10: v1(1685.04,3968.5) 1716.54,3968.5 1740.16,3944.88 1740.16,3799.21 2027.56,3511.81 2704.72,3511.81 v2(2716.54,3523.62) ; v2(2905.51,3523.62) 2917.32,3511.81 3574.8,3511.81 3629.92,3566.93 v1@3629.92,3905.51
TXD2_Out: RS232.3 U1.14 | length 1046.8
  Top Layer w10: U1.14@3554.13,4001.57 3556.54,4003.98 3556.54,4095.91 v1(3566.93,4106.3)
  Bottom Layer w10: v1(3566.93,4106.3) 3574.8,4114.17 4137.8,4114.17 4153.54,4129.92 4153.54,4263.78 4165.35,4275.59 4299.21,4275.59 4313.67,4261.13 RS232.3@4313.67,4225.57
TXD3: U2.4 U5.51 | length 1852.8
  Top Layer w10: U5.51@1950.47,4333.15 1950.47,4371.73 1984.25,4405.51 v1(1984.25,4421.26) ; v1(3635.63,4325) U2.4@3697.53,4325
  Bottom Layer w10: v1(1984.25,4421.26) 2047.87,4357.65 3602.36,4357.65 3633.24,4326.77 v1@3633.86,4326.77
Vout0: DA0.1 R7.2 R9.1 U7.2 | length 3000.7
  Top Layer w18: U7.2@3108.14,3049.32 v2(3108.14,3127.83) ; R7.2@4331.43,2434.98 4356.78,2409.63 4448.82,2409.63 R9.1@4520.18,2409.63
  Top Layer w30: 4448.82,2409.63 v3(4448.82,2937.01)
  Bottom Layer w18: v2(3108.14,3127.83) 3108.14,3017.84 3145.67,2980.32 4405.51,2980.32 v3(4448.82,2937.01)
  Bottom Layer w30: v3(4448.82,2937.01) 4807.09,2937.01 4834.65,2964.57 4834.65,3188.98 4813.62,3210 DA0.1@4753.64,3210
Vout1: *3.6 *3.15 *3.16 DA1.1 | length 2434.7
  Top Layer w18: *3.6@3768.63,1389.91 3806.94,1389.91 3838.58,1358.27 3838.58,1279.53 3858.27,1259.84 4055.12,1259.84 4074.8,1279.53 4074.8,1382.17 4082.54,1389.91 *3.15@4132.96,1389.91 4132.96,1413.39 ; *3.16@4132.96,1439.91 4132.96,1413.39 ; v3(4385.83,1413.39) 4132.96,1413.39
  Bottom Layer w30: v3(4385.83,1413.39) 4460.63,1413.39 4503.94,1456.69 4503.94,2606.3 4547.64,2650 DA1.1@4753.64,2650
  other v3: 4444.88,1413.39
pads on no net: *1.2 *1.4 *1.6 *1.12 *1.13 *1.22 *1.25 *2.3 *3. *3.3 *3.8 *3.12 *4. *4.3 *4.8 *4.12 *6.3 *7.3 *8.3 *10.3 *10.4 RS232.1 RS232.2 RS232.6 RS232.7 RS232.8 RS232.9 RS232.10 U1.7 U1.8 U1.9 U1.10 U5.2 U5.3 U5.4 U5.11 U5.14 U5.15 U5.20 U5.21 U5.22 U5.23 U5.24 U5.25 U5.26 U5.27 U5.28 U5.37 U5.38 U5.39 U5.40 U5.41 U5.50 U5.54 U5.55 U5.56 U5.61 U5.62 U9.9 U9.10 U9.11 U9.12 U9.13 U9.14 U9.15 U10.5 USART. USART.4 USART.6 USART.7 Y1.2 Y1.4 Y2.2 Y2.4

## Polygon pours and split planes (outlines as drawn)
GND on Top Layer "1" (solid, remove dead copper, pour order 10): 2236.27,1024.18 1039.42,1024.18 1023.67,1039.93 1023.67,4862.76 1043.35,4882.45 4862.25,4882.45 4881.94,4862.76 4881.94,3429.69 2850.44,3429.69 2850.44,2004.5 2236.27,2004.5
SGND on Top Layer "Top Layer-No Net" (solid, pour order 8): 2241.22,1018.62 2241.22,1369.02 2241.22,1998.94 2855.39,1998.94 2855.39,3424.13 3260.91,3424.13 4886.89,3424.13 4886.89,3317.83 4886.89,1034.37 4871.14,1018.62
GND on Bottom Layer "1" (solid, remove dead copper, pour order 12): 2236.27,1024.18 1039.42,1024.18 1023.67,1039.93 1023.67,4862.76 1043.35,4882.45 4862.25,4882.45 4881.94,4862.76 4881.94,3429.69 2850.44,3429.69 2850.44,2004.5 2236.27,2004.5
SGND on Bottom Layer "Top Layer-No Net" (solid, remove dead copper, pour order 6): 2241.22,1018.62 2241.22,1369.02 2241.22,1998.94 2855.39,1998.94 2855.39,3424.13 3260.91,3424.13 4886.89,3424.13 4886.89,3317.83 4886.89,1034.37 4871.14,1018.62

## Other copper
Top Layer:
  rectangle net +5V: 4547.24,1818.9 4578.74,1909.45
  rectangle net SGND: 2901.57,1279.53 2972.44,1496.06
  rectangle: 2877.95,3716.54 3145.67,3783.46
  rectangle net -12: 3503.94,1094.49 3641.73,1307.09
  rectangle net -12: 1555.12,1141.73 1649.61,1374.02
  rectangle net -12: 3968.5,2374.02 4200.79,2417.32
  rectangle net -12: 4149.61,1279.53 4208.66,1346.46
  rectangle net -12: 4098.43,1283.19 4165.35,1338.58
  rectangle net -12: 4043.31,1937.01 4098.43,2047.24
  rectangle net -12: 3818.9,1932.8 4078.74,2000
  rectangle net -12: 3610.24,1751.97 3838.58,1795.28
  rectangle net GND: 2625.98,3035.43 2677.17,3059.06
  rectangle net GND: 2637.8,3015.75 2681.1,3059.06
  rectangle net GND: 2649.61,2771.38 2681.1,3059.06
  rectangle net GND: 1984.25,2771.38 2681.1,2818.9
  rectangle net +5V: 2000,2161.14 2066.93,2748.03
  rectangle net +5V: 1700.79,1999.72 2015.75,2043.31
  rectangle net +5V: 1771.65,2016.34 1811.02,2096.89
  rectangle net +5V: 1715.8,1590.28 1811.02,1645.67
  rectangle net +5V: 1744.09,1279.53 1811.02,1622.05
  rectangle net +5V: 2000,1992.13 2185.04,2173.23
  rectangle net +5V: 2421.26,2118.11 2625.98,2173.23
  rectangle net +5V: 2366.14,2117.83 2433.07,2173.23
  rectangle net +5V: 2307.09,2117.83 2374.02,2173.23
  rectangle net NetD1_2: 2511.81,2527.28 2578.74,2582.68
  rectangle net NetD1_2: 2460.63,2527.28 2527.56,2582.68
  rectangle net NetD1_2: 2354.33,2527.28 2421.26,2582.68
  rectangle net NetD1_2: 2397.64,2527.28 2464.57,2582.68
  rectangle net NetD1_2: 2295.28,2527.28 2362.2,2582.68
  rectangle net Vout1: 4149.61,1377.95 4468.5,1448.82
  rectangle net Vout1: 4101.46,1385.55 4168.39,1440.94
  rectangle net Vout0: 4381.89,2385.55 4547.24,2433.07
  rectangle net Net*4_6: 4157.48,2590.28 4401.57,2645.67
  rectangle net Net*4_6: 4101.46,2590.28 4168.39,2645.67
  rectangle net +12: 4429.13,1755.91 4539.37,2086.61
  rectangle net +12: 4625.98,2055.12 4692.91,3173.23
  rectangle net +12: 4610.24,3216.26 4692.91,3366.14
  rectangle net +12: 4519.68,3161.42 4692.91,3228.35
  rectangle net SGND: 4783.46,3361.93 4850.39,3417.32
  rectangle net SGND: 4811.02,1720.47 4854.33,3444.88
  rectangle net SGND: 3669.29,3389.49 4846.46,3444.88
  rectangle net SGND: 2877.95,1291.06 2933.07,2511.81
  rectangle net SGND: 3346.46,3350.12 3736.22,3405.51
  rectangle net SGND: 3141.73,3243.82 3370.08,3417.32
  rectangle net SGND: 3590.55,2354.33 3629.92,2590.55
  rectangle net SGND: 3586.61,2543.31 3610.24,2590.55
  rectangle net SGND: 2976.38,2559.06 3602.36,2590.55
  rectangle net SGND: 2976.38,2503.66 3043.31,2574.8
  rectangle net SGND: 3090.55,2326.77 3177.17,2417.32
  rectangle net SGND: 3039.37,2393.7 3177.17,2440.94
  rectangle net SGND: 2877.95,2393.7 3043.31,2511.81
  rectangle net SGND: 3086.61,1712.32 3263.78,1755.91
  rectangle net SGND: 3362.2,1129.65 3397.64,1302.87
  rectangle net SGND: 2736.22,1129.92 3393.7,1173.23
  rectangle net SGND: 2732.28,1129.92 2972.44,1310.75
  rectangle net SGND: 3208.66,1716.54 3263.78,1909.45
  rectangle net SGND: 2338.58,1869.8 3338.58,1921.26
  rectangle net SGND: 4133.86,3165.35 4334.65,3307.09
  rectangle net SGND: 3818.9,3248.03 4551.18,3311.02
  rectangle net SGND: 3598.43,2122.05 4602.36,2362.2
  rectangle net -5V: 2362.2,2700.79 2897.64,2748.03
  rectangle net -5V: 2708.66,2700.79 2850.39,3220.47
  rectangle net -5V: 2602.36,3078.74 2771.65,3220.47
  rectangle net GND: 1311.02,2444.88 1539.37,2618.11
  rectangle net -5V: 1291.34,2885.83 1551.18,3066.93
  rectangle net -12: 3566.93,2889.76 3645.67,3125.98
  rectangle net -12: 4039.37,2854.33 4098.43,3224.41
  rectangle net -12: 3818.9,2849 4078.74,3078.74
  rectangle net +12: 3826.77,1543.31 4303.15,1598.43
  rectangle net +12: 4251.97,1586.61 4531.5,1791.34
  rectangle net +12: 4098.43,1480.32 4515.75,1598.43
  rectangle net +12: 4251.97,1755.91 4527.56,1952.76
  rectangle net -12: 3818.9,1629.92 4165.35,1944.88
  rectangle net -12: 1141.73,1362.2 1645.67,1507.87
  rectangle net +12: 1082.68,1826.77 1614.17,2165.35
  rectangle net +12: 1082.68,2055.12 1311.02,2259.84
  rectangle net GND: 2645.67,3992.13 2740.16,4149.61
  rectangle net GND: 2547.24,3905.51 2740.16,4003.94
  rectangle net GND: 2023.62,3299.21 2681.1,3496.06
  rectangle net +12: 1082.68,3248.03 1468.5,3496.06
  rectangle net SGND: 3090.55,2303.15 3169.29,2342.52
  rectangle net +5V: 2519.68,1263.78 2586.61,1322.83
  rectangle net +5V: 3090.55,1263.78 3149.61,1322.83
  rectangle net +5V: 2157.48,1877.95 2311.02,2169.29
  rectangle net GND: 1437.01,4031.5 1476.38,4051.18
  rectangle net 3.3V: 1665.35,3661.42 1728.35,3748.03
Bottom Layer:
  rectangle net -12: 3503.94,1043.31 3641.73,1133.86
  rectangle net -12: 3968.5,2374.02 4086.61,2933.07
  rectangle net SGND: 3814.96,3090.55 4602.36,3311.02
  rectangle net -5V: 2484.25,2318.9 2732.28,2748.03
  rectangle net -5V: 1751.97,2224.41 2732.28,2401.57
  rectangle net -5V: 1751.97,2291.34 1850.39,2870.08
  rectangle net -5V: 1751.97,2846.46 1893.7,3023.62
  rectangle net GND: 1515.75,2354.33 1641.73,2531.5

## Silkscreen, mask and mechanical layers (free items; w line width, h text height)
Bottom Overlay:
  text "IO" at 1867.45,4684.15 h60 r270
  text "5V" at 1964.57,4674.15 h60 r270
  text "H" at 3188.98,4673.23 h60 r90
  text "L" at 3236.22,4637.8 h60 r270
  text "B" at 3720.47,4629.92 h60 r270
  text "A" at 3622.05,4625.98 h60 r270
  text "CLK" at 1665.35,4614.17 h60 r270
  text "GND" at 1766.4,4614.17 h60 r270
  text "GND" at 3818.9,4511.81 h60 r270
  text "GND" at 4232.28,4401.57 h60 r270
  text "RX" at 4181.1,4055.12 h60 r270
  text "TX" at 4283.46,4055.12 h60 r270
  text "Vout0" at 4669.29,3185.04 h60
  text "GND" at 4669.29,3078.74 h60
  text "IPMC Platform" at 1196.85,2826.77 h60 r90
  text "IBSS 180131" at 1311.02,2822.83 h60 r90
  text "Vout1" at 4669.29,2622.05 h60
  text "GND" at 4669.29,2519.68 h60
  text "F+" at 4669.29,2007.87 h60
  text "F-" at 4669.29,1908.14 h60
  text "+12V" at 1683.84,1838.58 h60
  text "5V" at 4669.29,1808.4 h60
  text "GND" at 4669.29,1708.66 h60
  text "GND" at 1633.86,1641.73 h60
  text "-12V" at 1683.84,1448.82 h60
Drill Drawing:
  lines w7.99: 999.84,1047.64 ccw(c1047.64,1047.64) 1047.64,999.84 ; 999.84,4853.94 cw(c1047.64,4853.94) 1047.64,4901.73 4854.72,4901.57 ; 4853.94,999.84 ccw(c4853.94,1047.64) 4901.73,1047.64 ; 4853.94,4901.73 cw(c4853.94,4853.94) 4901.73,4853.94
  lines w8: 999.84,4853.94 1000,1045.67 ; 1042.13,1000 4853.94,1000 ; 4901.57,4857.09 4901.73,1047.64